# Altium PCB 1632440A+STM32F103RCT6核心板核心板.pcbdoc (part 1 of 2)
Units mil, origin at the board's own origin, x right, y up, seen from the top; angles counter-clockwise.
Board outline 4628.86 x 2908 mil, 2 copper layers (Top Layer, Bottom Layer); 59 components, 70 nets, 308 pads, 126 vias.
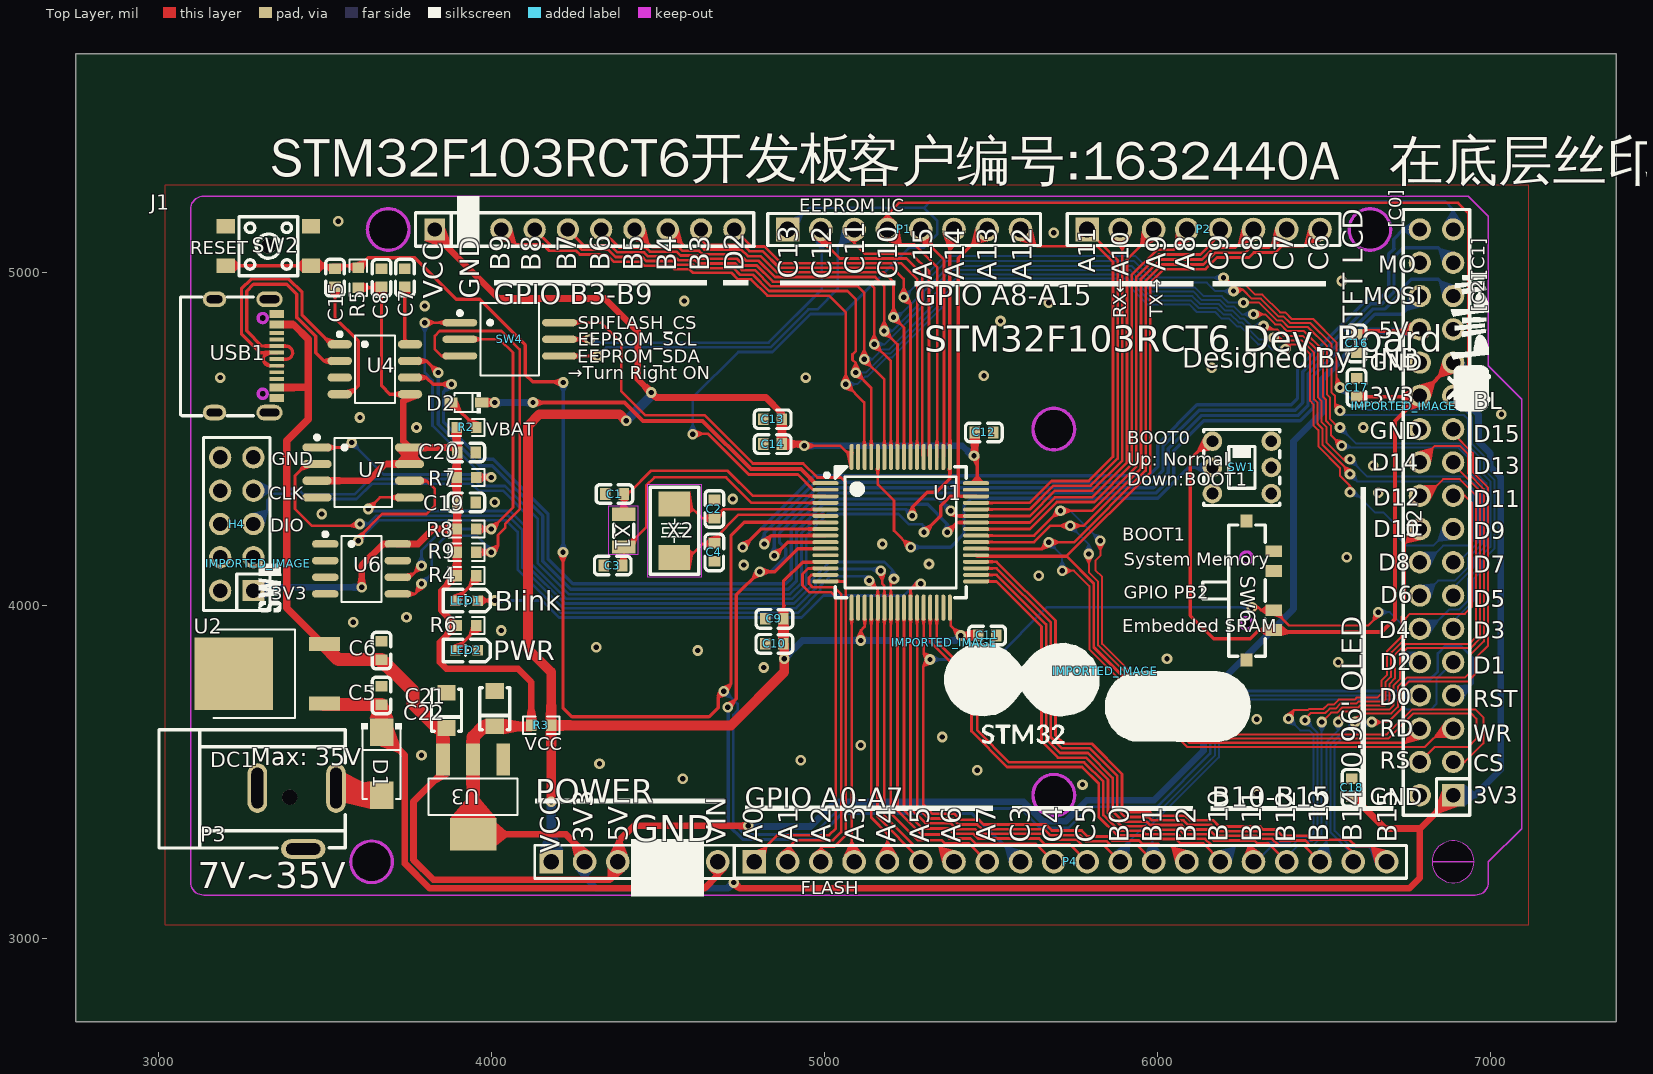
[diagram p0: Top Layer view]
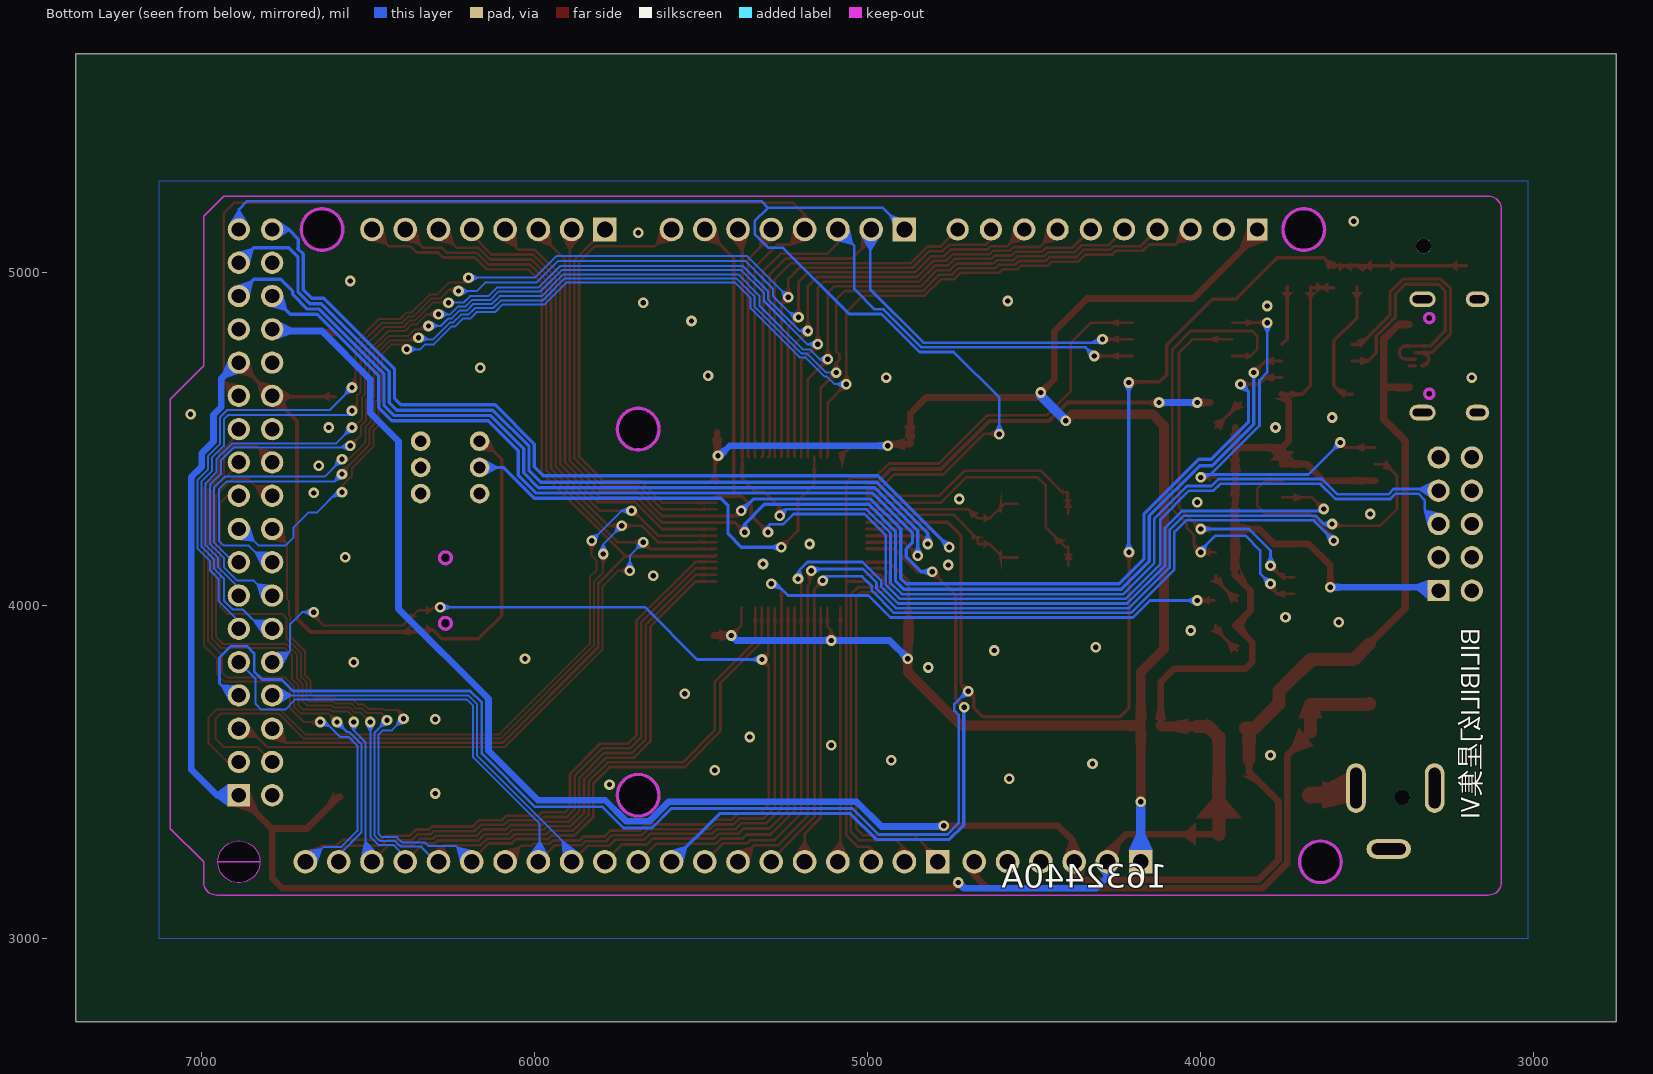
[diagram p1: Bottom Layer view, seen from below]

## Layer stack, top to bottom
Top Layer: signal copper (thickness not stored)
Dielectric: dielectric 12.6, FR-4, Dk 4.8
Bottom Layer: signal copper (thickness not stored)

## Board outline
7378.86,2750 2750,2750 2750,5658 7378.86,5658
cut-out: 6701.36,5130 ccw(c6638.86,5129.57) 6576.36,5130 ccw(c6638.86,5130.43)
cut-out: 5751.36,3430 ccw(c5688.86,3429.57) 5626.36,3430 ccw(c5688.86,3430.43)
cut-out: 5751.36,4530 ccw(c5688.86,4529.57) 5626.36,4530 ccw(c5688.86,4530.43)
cut-out: 3751.36,5130 ccw(c3688.86,5129.57) 3626.36,5130 ccw(c3688.86,5130.43)
cut-out: 3701.36,3230 ccw(c3638.86,3229.57) 3576.36,3230 ccw(c3638.86,3230.43)
cut-out: 6825.86,3230 ccw(c6888.85,3230) 6951.84,3230 ccw(c6888.85,3230)

## Design rules (kind name [scope] priority, off if disabled: settings)
BoardOutlineClearance Default [All] p0: genericclearance=10 ignorepadtopadclearanceinfootprint=FALSE except(0: Region-CutoutEdge Arc-SplitContinuation Track-SplitContinuation SMDPad-SplitContinuation THPad-SplitContinuation Via-SplitContinuation Fill-SplitContinuation Poly-SplitContinuation Region-SplitContinuation Text-SplitContinuation; 6: Track-OutlineEdge SMDPad-OutlineEdge THPad-OutlineEdge Via-OutlineEdge Fill-OutlineEdge Region-OutlineEdge Poly-OutlineEdge Text-OutlineEdge Track-CutoutEdge SMDPad-CutoutEdge THPad-CutoutEdge Via-CutoutEdge Fill-CutoutEdge)
Clearance Default [(InNet('GND') OR InNet('VCC') OR InNet('+5V') OR InNet('NRST') OR InNet('PC13') OR InNet('VIN') OR InNet('PA15') OR InNet('PA12') OR InNet('PA11') OR InNet('PA8') OR InNet('PC14') OR InNet('PC15') OR InNet('BOOT0') OR InNet('PD2') OR InNet('PA14') OR InNet('PA13') OR InNet('PA10') OR InNet('PA9') OR InNet('BOOT1') OR InNet('PC5') OR InNet('PC4') OR InNet('PA4') OR InNet('PA3') OR InNet('PA1') OR InNet('PA0') OR InNet('PC3') OR InNet('PC2') OR InNet('PC1') OR InNet('PC0') OR InNet('PD1') OR InNet('PD0') OR InNet('VBAT') OR InNet('D-') OR InNet('D+') OR InNet('3V3') OR InNet('$1N18623') OR InNet('RTS#') OR InNet('$1N19799') OR InNet('$1N22553') OR InNet('$1N23236') OR InNet('$1N24394') OR InNet('LCD_CS') OR InNet('LCD_RS') OR InNet('LCD_WR') OR InNet('LCD_RD') OR InNet('LCD_D0') OR InNet('LCD_D1') OR InNet('LCD_D3') OR InNet('LCD_D4') OR InNet('LCD_D5') OR InNet('LCD_D6') OR InNet('LCD_D7') OR InNet('LCD_D8') OR InNet('LCD_D9') OR InNet('LCD_D10') OR InNet('LCD_D11') OR InNet('LCD_D12') OR InNet('LCD_D13') OR InNet('LCD_D14') OR InNet('LCD_D15') OR InNet('LCD_BL') OR InNet('EEPROM_SCL') OR InNet('EEPROM_SDA') OR InNet('FLASH_MOSI') OR InNet('FLASH_MISO') OR InNet('FLASH_SCLK') OR InNet('FLASH_CS') OR InNet('JP_EEPROM_SCL') OR InNet('JP_EEPROM_SDA') OR InNet('JP_FLASH_CS'))] p1: gap=7 ignorepadtopadclearanceinfootprint=FALSE except(0: Region-Region Region-Text Text-Text; 6: Track-Track Track-SMDPad SMDPad-SMDPad Track-THPad SMDPad-THPad THPad-THPad Track-Via SMDPad-Via THPad-Via Via-Via Track-Fill SMDPad-Fill THPad-Fill Via-Fill Fill-Fill Track-Region SMDPad-Region THPad-Region Via-Region Fill-Region Track-Poly SMDPad-Poly THPad-Poly Via-Poly Fill-Poly Region-Poly Poly-Poly Track-Text SMDPad-Text THPad-Text Via-Text Fill-Text Poly-Text Track-Sheet SMDPad-Sheet THPad-Sheet Via-Sheet Fill-Sheet Region-Sheet Poly-Sheet Text-Sheet Track-Hole SMDPad-Hole THPad-Hole Via-Hole Fill-Hole Region-Hole Poly-Hole Text-Hole Sheet-Hole)
DiffPairsRouting differentialPair [All] p1: maxuncoupledlength=10 minlimit=6 maxlimit=6 mostfreqgap=6 toplayer_minwidth=5 toplayer_prefwidth=10 toplayer_maxwidth=100 bottomlayer_minwidth=5 bottomlayer_prefwidth=10 bottomlayer_maxwidth=100
PasteMaskExpansion pasteMaskExpansion [All] p1: expansion=0
PlaneConnect Default [All] p1: planeconnectstyle=Relief reliefexpansion=20 reliefentries=4 reliefconductorwidth=0 reliefairgap=10
PolygonConnect gge66728 [All] p1: connectstyle=Relief reliefentries=4 reliefconductorwidth=0 polygonreliefangle="90 Angle" airgapwidth=10
PolygonConnect gge66721 [All] p1: connectstyle=Relief reliefentries=4 reliefconductorwidth=0 polygonreliefangle="90 Angle" airgapwidth=10
RoutingVias Default [All] p1: viastyle="Through Hole" holewidth=16 minholewidth=16 maxholewidth=2362 width=32 minwidth=32 maxwidth=3938
SolderMaskExpansion solderMaskExpansion [All] p1: useseparateexpansions=TRUE expansion=4 expansionbottom=4
Width Default [All] p1: maxlimit=1000 minlimit=6 preferedwidth=10

## Components (designator, comment, footprint, x,y, rotation, side; value= is the part's Value field where it differs from the comment)
C1 "7pF" C0603 4368.86,4335 r0 top
C2 "20pF" C0603 4668.86,4290 r270 top
C3 "7pF" C0603 4363.86,4120 r0 top
C4 "20pF" C0603 4668.86,4160 r90 top
C5 "GRM188R6YA106MA73D" C0603 3668.86,3730 r90 top
C6 "GRM188R6YA106MA73D" C0603 3668.86,3865 r90 top
C7 "CL10B104KB8NNNC" C0603 3738.86,4985 r270 top
C8 "CL10B104KB8NNNC" C0603 3668.86,4985 r90 top
C9 "100nF" C0603 4848.86,3960 r180 top
C10 "100nF" C0603 4848.86,3885 r180 top
C11 "100nF" C0603 5488.86,3910 r0 top
C12 "100nF" C0603 5478.86,4520 r0 top
C13 "100nF" C0603 4843.86,4560 r180 top
C14 "100nF" C0603 4843.86,4485 r180 top
C15 "100nF" C0603 3528.86,4985 r270 top
C16 "100nF" C0603 6598.86,4787.56 r270 top
C17 "100nF" C0603 6598.86,4655 r90 top
C18 "100nF" C0603 6583.86,3452.56 r90 top
C19 "100nF" C0603 3923.86,4310 r0 top
C20 "100nF" C0603 3923.86,4460 r0 top
C21 "10uF" CAP-SMD_L3.2-W1.6 3863.86,3685 r90 top
C22 "10uF" CAP-SMD_L3.2-W1.6 4008.86,3690 r90 top
D1 "SS34" SMA_L4.3-W2.7-LS5.1-RD 3668.86,3525 r270 top
D2 "1N5819WS" SOD-323_L1.8-W1.3-LS2.5-RD 3923.86,4610 r180 top
DC1 "DC-005-20A" DC-IN-TH_DC-005-20A 3413.86,3360 r0 top
H2 "DS1023-2*18SF11" HDR-TH_36P-P2.54-V-F-R2-C18-S2.54-1 6838.86,4280 r90 top
H4 "DS1023-2*5SF11" HDR-TH_10P-P2.54-V-F-R2-C5-S2.54 3233.86,4245 r90 top
IMPORTED_IMAGE "IMPORTED_IMAGE" IMPORTED_IMAGE 3298.86,4125.81 r0 top
IMPORTED_IMAGE "IMPORTED_IMAGE" IMPORTED_IMAGE 6740.24,4598.57 r0 top
IMPORTED_IMAGE "IMPORTED_IMAGE" IMPORTED_IMAGE 5359.89,3887.72 r0 top
IMPORTED_IMAGE "IMPORTED_IMAGE" IMPORTED_IMAGE 5843.42,3802.46 r0 top
J1 "2.54-1*10P母" HDR-TH_10P-P2.54-V-F 4278.86,5130 r0 top
LED1 "19-217/GHC-YR1S2/3T" LED0603-R-RD 3923.86,4015 r180 top
LED2 "19-217/GHC-YR1S2/3T" LED0603-R-RD 3923.86,3865 r180 top
P1 "2.54-1*8P母环保" HDR-TH_8P-P2.54-V-F-1 5238.86,5130 r0 top
P2 "2.54-1*8P母环保" HDR-TH_8P-P2.54-V-F-1 6138.86,5130 r0 top
P3 "2.54-1*6P母" HDR-TH_6P-P2.54-V-F 4428.86,3230 r0 top
P4 "2.54-1*20P母" HDR-TH_20P-P2.54-V-F 5738.86,3230 r0 top
R2 "0Ω" R0603 3923.86,4535 r0 top
R3 "0Ω" R0603 4148.86,3640 r0 top
R4 "0603WAF1001T5E" R0603 3923.86,4090 r0 top
R5 "0603WAF1002T5E" R0603 3598.86,4985 r270 top
R6 "0603WAF1001T5E" R0603 3923.86,3940 r0 top
R7 "0603WAF1002T5E" R0603 3923.86,4385 r180 top
R8 "0603WAF1002T5E" R0603 3923.86,4230 r180 top
R9 "0603WAF1002T5E" R0603 3923.86,4160 r0 top
SW1 "XKB5858-Z-75" SW-TH_6P-L5.8-W5.8-P2.00-LS4.5-BL 6253.86,4415 r90 top
SW2 "4.5x4.5x3.8贴片" SW-SMD_4P-L4.5-W4.5-P3.00-LS6.8 3328.86,5080 r180 top
SW4 "DSHP03TS-S" SW-SMD_DSHP03TS-S 4053.86,4800 r270 top
SW6 "K3-1311S-F1" SW-SMD_K3-1311S-F1 6308.86,4045 r270 top
U1 "STM32F103RCT6" LQFP-64_L10.0-W10.0-P0.50-LS12.0-BL 5228.86,4220 r270 top
U2 "CJ7805 3%" TO-252-2_L6.6-W6.1-P4.58-LS10.1-BR-CW 3361.16,3795 r0 top
U3 "SK1117-3.3" SOT-223_L6.5-W3.5-P2.30-LS7.0-BR 3943.86,3425 r90 top
U4 "CH340N" SOP-8_L4.9-W3.9-P1.27-LS6.0-BL 3648.86,4710 r270 top
U6 "AT24C02" SOP-8_L5.0-W4.0-P1.27-LS6.0-BL 3608.86,4110 r270 top
U7 "BY25Q64ASSIG(T)" SOIC-8_L5.3-W5.3-P1.27-LS8.0-BL 3613.86,4400 r270 top
USB1 "TYPE-C 16PIN 2MD(073)" USB-C-SMD_TYPE-C-6PIN-2MD-073 3260.35,4750.15 r270 top
X1 "32.768kHz" FC-135R_L3.2-W1.5 4396.42,4225.21 r270 top
X2 "8MHz" CRYSTAL-SMD_L5.0-W3.2 4548.86,4225 r90 top

## Footprints (in the part's own frame and the unit in brackets; to place one, negate y for a bottom-side part, rotate by r counter-clockwise, add the part's x,y. Pads: shape width x height; smd on the part's side, far side on the other; paste and mask are expansions set on the pad)
C0603 [mm]
  rect 0.8x0.9 smd: 1(-0.7,0) 2(0.7,0)
  silkscreen extent -1.41,-0.71 1.39,0.72
CAP-SMD_L3.2-W1.6 [mil]
  rect 47.2x55.1 smd: 1(-53.1,0) 2(53.2,0)
  silkscreen extent -63,-45 63,45
CRYSTAL-SMD_L5.0-W3.2 [mil]
  rect 74.8x94.5 smd: 1(-80.7,0) 2(80.7,0)
  silkscreen extent -131,-73 131,73
DC-IN-TH_DC-005-20A [mm]
  oval 1.5x3.8 hole 0.9 slot 3.1 at 90 deg copper offset -0.001,0: 1(3.001,2.325)
  oval 1.5x3.8 hole 0.9 slot 3.1 at 90 deg copper offset 0,0: 2(-3.001,2.325)
  oval 3.4x1.5 hole 0.9 slot 2.6 at 0 deg copper offset -0.001,0: 3(0.501,-2.325)
  silkscreen extent -10.51,-2.24 3.71,6.78
FC-135R_L3.2-W1.5 [mil]
  rect 39.4x70.9 smd: 1(-49.2,0) 2(49.2,0)
  silkscreen extent -20,-30 20,30
HDR-TH_6P-P2.54-V-F [mm]
  rect 1.8x1.8 hole 1.2: 1(-6.35,0)
  round 1.8 hole 1.2: 2(-3.81,0) 3(-1.27,0) 4(1.27,0) 5(3.81,0) 6(6.35,0)
  silkscreen extent -7.62,-1.27 7.62,1.27
HDR-TH_8P-P2.54-V-F-1 [mil]
  rect 70.9x70.9 hole 47.2: 1(-350,0)
  round 70.9 hole 47.2: 2(-250,0) 3(-150,0) 4(-50,0) 5(50,0) 6(150,0) 7(250,0) 8(350,0)
  silkscreen extent -410,-48 410,48
HDR-TH_10P-P2.54-V-F [mil]
  rect 62x66.9 hole 43.3: 1(-450,0)
  round 66.9 hole 43.3: 2(-350,0) 3(-250,0) 4(-150,0) 5(-50,0) 6(50,0) 7(150,0) 8(250,0) 9(350,0) 10(450,0)
  silkscreen extent -508,-50 510,50
HDR-TH_10P-P2.54-V-F-R2-C5-S2.54 [mm]
  rect 1.575x1.7 hole 1.1: 1(-5.08,-1.27)
  round 1.7 hole 1.1: 2(-5.08,1.27) 3(-2.54,-1.27) 4(-2.54,1.27) 5(0,-1.27) 6(0,1.27) 7(2.54,-1.27) 8(2.54,1.27) 9(5.08,-1.27) 10(5.08,1.27)
  silkscreen extent -6.6,-2.54 6.6,2.54
HDR-TH_20P-P2.54-V-F [mm]
  rect 1.8x1.8 hole 1.2: 1(-24.13,0)
  round 1.8 hole 1.2: 2(-21.59,0) 3(-19.05,0) 4(-16.51,0) 5(-13.97,0) 6(-11.43,0) 7(-8.89,0) 8(-6.35,0) 9(-3.81,0) 10(-1.27,0) 11(1.27,0) 12(3.81,0) 13(6.35,0) 14(8.89,0) 15(11.43,0) 16(13.97,0) 17(16.51,0) 18(19.05,0) 19(21.59,0) 20(24.13,0)
  silkscreen extent -25.65,-1.25 25.65,1.25
HDR-TH_36P-P2.54-V-F-R2-C18-S2.54-1 [mm]
  rect 1.7x1.7 hole 1.1: 1(-21.59,-1.27)
  round 1.7 hole 1.1: 2(-21.59,1.27) 3(-19.05,-1.27) 4(-19.05,1.27) 5(-16.51,-1.27) 6(-16.51,1.27) 7(-13.97,-1.27) 8(-13.97,1.27) 9(-11.43,-1.27) 10(-11.43,1.27) 11(-8.89,-1.27) 12(-8.89,1.27) 13(-6.35,-1.27) 14(-6.35,1.27) 15(-3.81,-1.27) 16(-3.81,1.27) 17(-1.27,-1.27) 18(-1.27,1.27) 19(1.27,-1.27) 20(1.27,1.27) 21(3.81,-1.27) 22(3.81,1.27) 23(6.35,-1.27) 24(6.35,1.27) 25(8.89,-1.27) 26(8.89,1.27) 27(11.43,-1.27) 28(11.43,1.27) 29(13.97,-1.27) 30(13.97,1.27) 31(16.51,-1.27) 32(16.51,1.27) 33(19.05,-1.27) 34(19.05,1.27) 35(21.59,-1.27) 36(21.59,1.27)
  silkscreen extent -23.11,-2.54 23.11,2.54
IMPORTED_IMAGE [mil]
  silkscreen extent 0,-146 68,0
LED0603-R-RD [mm]
  rect 0.8x0.8 smd: 1(0.851,0) 2(-0.851,0)
  silkscreen extent -1.82,-0.86 1.77,0.86
LQFP-64_L10.0-W10.0-P0.50-LS12.0-BL [mm]
  oval 0.3x2 smd: 1(-3.75,-5.75) 2(-3.25,-5.75) 3(-2.75,-5.75) 4(-2.25,-5.75) 5(-1.75,-5.75) 6(-1.25,-5.75) 7(-0.75,-5.75) 8(-0.25,-5.75) 9(0.25,-5.75) 10(0.75,-5.75) 11(1.25,-5.75) 12(1.75,-5.75) 13(2.25,-5.75) 14(2.75,-5.75) 15(3.25,-5.75) 16(3.75,-5.75) 33(3.75,5.75) 34(3.25,5.75) 35(2.75,5.75) 36(2.25,5.75) 37(1.75,5.75) 38(1.25,5.75) 39(0.75,5.75) 40(0.25,5.75) 41(-0.25,5.75) 42(-0.75,5.75) 43(-1.25,5.75) 44(-1.75,5.75) 45(-2.25,5.75) 46(-2.75,5.75) 47(-3.25,5.75) 48(-3.75,5.75)
  oval 2x0.3 smd: 17(5.75,-3.75) 18(5.75,-3.25) 19(5.75,-2.75) 20(5.75,-2.25) 21(5.75,-1.75) 22(5.75,-1.25) 23(5.75,-0.75) 24(5.75,-0.25) 25(5.75,0.25) 26(5.75,0.75) 27(5.75,1.25) 28(5.75,1.75) 29(5.75,2.25) 30(5.75,2.75) 31(5.75,3.25) 32(5.75,3.75) 49(-5.75,3.75) 50(-5.75,3.25) 51(-5.75,2.75) 52(-5.75,2.25) 53(-5.75,1.75) 54(-5.75,1.25) 55(-5.75,0.75) 56(-5.75,0.25) 57(-5.75,-0.25) 58(-5.75,-0.75) 59(-5.75,-1.25) 60(-5.75,-1.75) 61(-5.75,-2.25) 62(-5.75,-2.75) 63(-5.75,-3.25) 64(-5.75,-3.75)
  silkscreen extent -5,-5.79 5,5
R0603 [mil]
  rect 31.75x34.02 smd: 1(-29.66,0) 2(29.66,0)
  silkscreen extent -55,-26 55,26
SMA_L4.3-W2.7-LS5.1-RD [mil]
  rect 82.7x70.9 smd: 1(-94.5,0) 2(94.5,0)
  silkscreen extent -121,-61 106,61
SOD-323_L1.8-W1.3-LS2.5-RD [mm]
  rect 1x0.75 smd: 1(-1.173,0) 2(1.173,0)
  silkscreen extent -1.08,-0.8 0.9,0.8
SOIC-8_L5.3-W5.3-P1.27-LS8.0-BL [mm]
  oval 0.63x2.25 smd: 1(-1.905,-3.53) 2(-0.635,-3.53) 3(0.635,-3.53) 4(1.905,-3.53) 5(1.905,3.53) 6(0.635,3.53) 7(-0.635,3.53) 8(-1.905,3.53)
  silkscreen extent -2.82,-3.68 2.64,2.18
SOP-8_L4.9-W3.9-P1.27-LS6.0-BL [mm]
  oval 0.63x1.865 smd: 1(-1.905,-2.682) 2(-0.635,-2.682) 3(0.635,-2.682) 4(1.905,-2.682) 5(1.905,2.682) 6(0.635,2.682) 7(-0.635,2.682) 8(-1.905,2.682)
  silkscreen extent -2.82,-2.83 2.58,1.52
SOP-8_L5.0-W4.0-P1.27-LS6.0-BL [mil]
  oval 22.6x80.14 smd: 1(-75,-108.97) 2(-25,-108.97) 3(25,-108.97) 4(75,-108.97) 5(75,108.97) 6(25,108.97) 7(-25,108.97) 8(-75,108.97)
  silkscreen extent -110,-115 99,60
SOT-223_L6.5-W3.5-P2.30-LS7.0-BR [mm]
  rect 2.465x1.05 smd: 1(2.857,-2.3) 2(2.857,0) 3(2.857,2.3)
  rect 2.465x3.54 smd: 4(-2.857,0)
  silkscreen extent -1.4,-3.4 1.4,3.4
SW-SMD_4P-L4.5-W4.5-P3.00-LS6.8 [mil]
  rect 55.1x43.3 smd: 1(-127.9,59.1) 2(128,59.1) 3(-127.9,-59.1) 4(128,-59.1)
  silkscreen extent -89,-89 89,89
SW-SMD_DSHP03TS-S [mil]
  oval 22x104.5 smd: 1(-50,-149.7) 2(0,-149.7) 3(50,-149.7) 4(50,149.7) 5(0,149.7) 6(-50,149.7)
  silkscreen extent -110,-156 110,88
SW-SMD_K3-1311S-F1 [mil]
  rect 35.4x49.2 smd: 1(-118.1,40.8) 2(-59.1,40.8) 3(59.1,40.8) 4(118.1,40.8)
  rect 39.4x35.4 smd: 5(-208.7,-40.8) 6(208.7,-40.8)
  Board Outline Layer circle w0.2: c-98.4,-40.8 r17.7
  Board Outline Layer circle w0.2: c98.4,-40.8 r17.7
  Board Outline Layer circle w10: c-98.4,-40.8 r17.7
  Board Outline Layer circle w10: c98.4,-40.8 r17.7
  Multi-Layer board cut-out: -98.4,-23.1 -107.15,-25.55 -113.54,-32.02 -115.87,-40.8 -113.54,-49.58 -107.15,-56.05 -98.4,-58.5 -98.4,-58.5 -89.65,-56.05 -83.26,-49.58 -80.93,-40.8 -83.26,-32.02 -89.65,-25.55 -98.4,-23.1
  Multi-Layer board cut-out: 98.4,-23.1 89.65,-25.55 83.26,-32.02 80.93,-40.8 83.26,-49.58 89.65,-56.05 98.4,-58.5 98.4,-58.5 107.15,-56.05 113.54,-49.58 115.87,-40.8 113.54,-32.02 107.15,-25.55 98.4,-23.1
  silkscreen extent -197,-173 197,15
SW-TH_6P-L5.8-W5.8-P2.00-LS4.5-BL [mm]
  round 1.5 hole 0.9: 1(-2,-2.25) 2(0,-2.25) 3(2,-2.25) 4(-2,2.25) 5(0,2.25) 6(2,2.25)
  silkscreen extent -2.9,-2.9 2.9,2.9
TO-252-2_L6.6-W6.1-P4.58-LS10.1-BR-CW [mil]
  rect 93.07x41.89 smd: 1(136.3,-90) 3(136.3,90)
  rect 236.37x217.01 smd: 2(-136.3,0)
  silkscreen extent -198,-133 48,133
USB-C-SMD_TYPE-C-6PIN-2MD-073 [mm]
  rect 0.6x1.1 smd: 1(-3.2,2.375) 2(-2.4,2.375) 11(2.4,2.375) 12(3.2,2.375)
  rect 0.3x1.1 smd: 3(-1.75,2.375) 4(-1.25,2.375) 5(-0.75,2.375) 6(-0.25,2.375) 7(0.25,2.375) 8(0.75,2.375) 9(1.25,2.375) 10(1.75,2.375)
  oval 1.2x2 hole 0.6 slot 1.5 at 90 deg: 13(-4.325,1.825) 14(4.325,1.825)
  oval 1.2x1.8 hole 0.6 slot 1.2 at 90 deg: 13(-4.325,-2.375) 14(4.325,-2.375)
  Board Outline Layer circle w0.005: c-2.89,1.305 r0.35
  Board Outline Layer circle w0.005: c2.89,1.305 r0.35
  Board Outline Layer circle w0.254: c-2.89,1.305 r0.35
  Board Outline Layer circle w0.254: c2.89,1.305 r0.35
  Multi-Layer board cut-out: -2.89,1.655 -3.063,1.606 -3.189,1.478 -3.235,1.305 -3.189,1.131 -3.063,1.004 -2.89,0.955 -2.89,0.955 -2.717,1.004 -2.591,1.131 -2.545,1.305 -2.591,1.478 -2.717,1.606 -2.89,1.655
  Multi-Layer board cut-out: 2.89,1.655 2.717,1.606 2.591,1.478 2.545,1.305 2.591,1.131 2.717,1.004 2.89,0.955 2.89,0.955 3.063,1.004 3.189,1.131 3.235,1.305 3.189,1.478 3.063,1.606 2.89,1.655
  silkscreen extent -4.5,-4.97 4.57,0.6

## Free pads (board coordinates)
  round 45.4 hole 45.4 unplated: ""(3328.86,5080) ""(3392.86,3424)

## Via types
v1: diameter 32, hole 16, Top Layer to Bottom Layer, 126 vias

## Nets (pads, with @x,y where several pads share a name; then routed paths per layer and width w, separated by ;. In a path a pad name is that pad's centre, name@x,y a point inside that pad or via, vN(x,y) a via of type N, cw(c..) or ccw(c..) an arc to the next point about the centre after c; other vN are vias at no path point)
3V3: C8.1 C17.1 C18.1 C19.1 C20.1 C22.1 H2.1 H2.26 H2.27 H4.1 P3.2 R2.1 R3.1 R4.1 R5.2 R6.1 R7.2 R8.2 R9.1 SW1.6 SW6.4 U3.2 U3.4 U4.5 U6.8 U7.3 U7.7 U7.8 | length 10782
  Top Layer w10: R5.2@3598.86,4955.34 3666.76,4955.34 C8.1@3668.86,4957.44 3668.86,4660 3693.86,4635 U4.5@3754.47,4635 ; SW1.6@6165.28,4493.74 6152.6,4493.74 6098.86,4440 6098.86,3970 6168.86,3900 6278.86,3900 6305.76,3926.9 SW6.4@6349.66,3926.9 ; C17.1@6598.86,4627.44 H2.26@6786.29,4627.44
  Top Layer w12: SW6.4@6349.66,3926.9 6356.56,3920 6673.86,3920 6713.86,3960 6713.86,4555.01 6786.29,4627.44 6788.85,4630 H2.27@6888.86,4730
  Top Layer w19.68: v1(3608.86,4055) 3608.86,4120 3673.86,4185 U6.8@3717.83,4185
  Top Layer w20: U7.3@3474.88,4375 3628.86,4375 3678.86,4425 U7.7@3752.84,4425 U7.8@3752.84,4475 ; U6.8@3717.83,4185 3778.86,4185 3823.86,4230 R8.2@3894.2,4230 ; U4.5@3754.47,4635 3734.47,4615 3733.86,4615 3733.86,4493.98 U7.8@3752.84,4475 ; R2.1@3894.2,4535 C20.1@3894.2,4462.1 ; C20.1@3896.3,4460 C20.1@3894.2,4462.1 ; U3.4@3943.86,3312.5 4223.08,3312.5 4278.86,3256.72 P3.2@4278.86,3230 ; R3.1@4119.2,3640 4118.86,3640.34 4118.86,3770 4078.86,3810 3863.86,3810 3843.86,3830 3843.86,3889.66 R6.1@3894.2,3940 3848.86,3985.34 3848.86,4044.66 R4.1@3894.2,4090 3896.3,4092.1 C19.1@3896.3,4310 3894.2,4312.1 R7.2@3894.2,4385 C20.1@3894.2,4462.1 ; v1(4726.86,3168) 4744.86,3150 6756.86,3150 6788.85,3181.99 6788.85,3329.46 ; C18.1@6583.86,3425 6588.86,3425 6683.86,3330 6788.3,3330 6788.85,3329.46 ; H2.1@6888.87,3430.01 6888.87,3429.48 6788.85,3329.46 ; U7.8@3752.84,4475 3881.3,4475 C20.1@3894.2,4462.1
  Top Layer w29.53: C22.1@4008.86,3636.9 4116.1,3636.9 R3.1@4119.2,3640
  Top Layer w39.37: U3.4@3943.86,3312.5 U3.2@3943.86,3537.5 3943.86,3605 3975.76,3636.9 C22.1@4008.86,3636.9
  Bottom Layer w19.68: H4.1@3283.86,4045 3293.86,4055 v1(3608.86,4055)
  Bottom Layer w20: P3.2@4278.86,3230 4278.86,3185 4313.86,3150 4708.86,3150 v1(4726.86,3168) ; H2.27@6888.85,4730 6893.86,4730 6941.29,4682.56 6941.29,4597.44 6962.86,4575.87 6962.86,4575.29 6964.86,4573.62 6964.86,4492.84 6999.86,4457.84 6999.86,4417.85 7031.86,4385.85 7031.03,4383.51 7031.86,4382.68 7031.86,3507.39 6954.47,3430 H2.1@6888.87,3430.01
$1N18623: D1.2 DC1.1 | length 145.6
  Top Layer w50: DC1.1@3532.01,3451.54 3551.51,3432 3667.36,3432 D1.2@3668.86,3430.5
$1N19799: C7.2 U4.8 | length 178.9
  Top Layer w10: C7.2@3738.86,4957.44 3738.86,4800.61 U4.8@3754.47,4785
$1N22553: D2.2 R2.2 | length 106.9
  Top Layer w10: D2.2@3877.69,4610 3952.69,4535 R2.2@3953.52,4535
$1N23236: LED1.1 R4.2 | length 101.2
  Top Layer w10: LED1.1@3890.36,4015 3953.52,4078.16 R4.2@3953.52,4090
$1N24394: LED2.1 R6.2 | length 101.2
  Top Layer w10: LED2.1@3890.36,3865 3953.52,3928.16 R6.2@3953.52,3940
+5V: C6.1 C16.1 C21.1 H2.30 P3.3 U2.3 U3.3 USB1.2 USB1.11 | length 6582.9
  Top Layer w12: C16.1@6597.46,4818.84 C16.1@6608.86,4815.12 ; C16.1@6601.18,4815.12 C16.1@6608.86,4815.12 ; H2.30@6788.85,4830 6783.85,4825 6618.74,4825 C16.1@6608.86,4815.12
  Top Layer w20: U3.3@3853.31,3537.5 3853.31,3499.45 3764.86,3411 3764.86,3235.77 3824.63,3176 4354.86,3176 4378.86,3200 P3.3@4378.86,3230 4383.86,3235 4383.86,3295 4426.86,3338 v1(4770.86,3338)
  Top Layer w22: USB1.11@3372.36,4655.51 3447.67,4655.51 3448.86,4656.69 ; USB1.2@3372.36,4844.48 3404.37,4844.48 3448.86,4800 3448.86,4656.69 ; U2.3@3491.46,3885 3383.86,3992.6 3383.86,4495 3448.86,4560 3448.86,4656.69
  Top Layer w39.37: U2.3@3491.46,3885 3539.02,3837.44 C6.1@3668.86,3837.44 3763.86,3742.44 3763.86,3705 3836.96,3631.9 C21.1@3863.86,3631.9 3853.31,3621.35 U3.3@3853.31,3537.5
  Bottom Layer w20: v1(4770.86,3338) 4772.86,3336 4958.13,3336 5032.13,3410 5597.84,3410 5656.34,3351.5 5724.36,3351.5 5787.86,3415 5990.09,3415 6138.86,3563.77 6138.86,3720 6408.86,3990 6408.86,4493.67 6493.86,4578.67 6493.86,4679.61 6639.24,4825 6783.85,4825 H2.30@6788.85,4830
BOOT0: SW1.5 U1.60 | length 1368
  Top Layer w8: U1.60@5159.96,4446.37 5159.96,4363.9 5208.86,4315 5208.86,4225 v1(5258.86,4175)
  Bottom Layer w10: v1(5258.86,4175) 5378.86,4175 5418.86,4215 5418.86,4300 5440.86,4322 6001.74,4322 6094.74,4415 SW1.5@6165.28,4415
BOOT1: H2.10 P4.14 SW6.3 U1.28 | length 3162.3
  Top Layer w6: SW6.3@6349.66,3985.9 6395.56,3940 6633.86,3940 6663.86,3970 v1(6663.86,3980)
  Top Layer w8: U1.28@5297.76,3993.63 5297.76,3857.1 v1(5316.86,3838) 5296.86,3818 5296.86,3402 5324.86,3374 5390.86,3374 5408.86,3356 5464.25,3356 5478.25,3342 5664.86,3342 5682.86,3324 5772.66,3324 5790.66,3306 5852.45,3306 5864.45,3294 5944.66,3294 5954.31,3284.35 6002.51,3284.35 6008.86,3278 6040.86,3278 P4.14@6088.86,3230 ; v1(6283.86,3995) 6301.99,3995 6311.09,3985.9 SW6.3@6349.66,3985.9
  Bottom Layer w6: v1(6663.86,3980) 6698.86,3980 6734.54,3944.32 6734.54,3864.32 6768.86,3830 H2.10@6788.86,3830
  Bottom Layer w8: v1(5316.86,3838) 5511.86,3838 5668.86,3995 v1(6283.86,3995)
D+: U4.1 USB1.6 USB1.8 | length 775.7
  Top Layer w10: USB1.8@3334.22,4720.34 cw(c3333.56,4740.16) USB1.6@3333.86,4760 ; USB1.8@3353.86,4720 ccw(c3348.86,5275.5) USB1.8@3372.36,4720.47 ; USB1.6@3353.86,4760 USB1.6@3333.86,4760 ; U4.1@3543.25,4785 3517.6,4785 3429.86,4872.74 3429.86,4941.63 3390.48,4981 3277.23,4981 3247.86,4951.63 3247.86,4816 3303.86,4760 USB1.6@3333.86,4760
D-: U4.2 USB1.5 USB1.7 | length 803.6
  Top Layer w10: USB1.7@3353.86,4740.31 3381.25,4740.31 3381.47,4740.1 ccw(c3381.76,4759.93) 3381.1,4779.76 3381.02,4779.68 USB1.5@3353.86,4779.68 3309.18,4779.68 3263.86,4825 3263.86,4945 3283.86,4965 3383.86,4965 3413.86,4935 3413.86,4866.11 ; U4.2@3543.25,4735 3495.86,4735 3470.86,4760 3470.86,4809.11 3413.86,4866.11 ; 3413.86,4866.11 3413.86,4864.34 3413.48,4866.48 3413.86,4866.11
EEPROM_SCL: P1.2 SW4.5 U1.53 | length 1968.5
  Top Layer w8: SW4.5@4203.56,4800 v1(4293.86,4800) ; P1.2@4988.86,5130 4988.86,5100 5045.86,5043 5245.86,5043 5293.97,4994.88 5293.97,4450.15 U1.53@5297.76,4446.37
  Bottom Layer w8: v1(4293.86,4800) 4303.86,4790 4832.06,4790 4991.52,4949.46 4991.52,5127.34 P1.2@4988.86,5130
EEPROM_SDA: P1.3 SW4.4 U1.52 | length 1979.1
  Top Layer w8: SW4.4@4203.56,4750 v1(4318.86,4750) ; P1.3@5088.86,5130 5088.86,5090 5121.86,5057 5261.66,5057 5313.86,5004.8 5313.86,4449.95 U1.52@5317.44,4446.37
  Bottom Layer w8: v1(4318.86,4750) 4344.86,4776 4837.86,4776 4951.86,4890 4978.86,4890 5039.43,4950.57 5039.43,5080.57 P1.3@5088.86,5130
FLASH_CS: P4.3 SW4.6 U1.16 | length 2395.2
  Top Layer w8: SW4.6@4203.56,4850 4328.86,4850 4388.86,4790 4388.86,4644.04 4460.9,4572 4639.48,4572 4784.48,4427 4935.9,4427 4978.26,4384.64 5049.22,4384.64 5063.86,4370 5063.86,4072.36 U1.16@5002.49,4072.36 ; P4.3@4988.86,3230 4988.86,3270 4993.86,3275 5028.86,3275 5063.86,3310 5063.86,4070
FLASH_MISO: P4.7 U1.22 U7.2 | length 3225.2
  Top Layer w8: U7.2@3474.88,4425 3443.86,4425 3408.86,4390 3408.86,4290 3458.86,4240 3598.86,4240 v1(3603.86,4245) ; v1(5168.86,4105) 5173.86,4100 5173.86,4065 5179.65,4059.21 U1.22@5179.65,3993.63 5179.65,3367.21 5266.86,3280 5338.86,3280 P4.7@5388.86,3230
  Bottom Layer w8: v1(3603.86,4245) 3628.86,4245 3653.86,4270 4049.06,4270 4091.86,4227.2 4091.86,4113.76 4213.62,3992 4914.09,3992 4972.86,4050.76 4972.86,4069 5013.86,4110 5163.86,4110 v1(5168.86,4105)
FLASH_MOSI: P4.8 U1.23 U7.5 | length 3057.8
  Top Layer w8: v1(3628.86,4290) 3663.86,4325 U7.5@3752.84,4325 ; 5198.86,4065 5199.33,4064.53 ; v1(5208.86,4080) 5199.33,4070.47 5199.33,4064.53 ; P4.8@5488.86,3230 5432.86,3286 5360.86,3286 5351.96,3294.9 5279.96,3294.9 5199.33,3375.53 U1.23@5199.33,3993.63 5199.33,4064.53
  Bottom Layer w8: v1(3628.86,4290) 3634.86,4284 4054.86,4284 4105.86,4233 4105.86,4119.56 4219.42,4006 4908.3,4006 4958.86,4056.56 4958.86,4074.8 5015.06,4131 5179.63,4131 5203.86,4106.77 5203.86,4085 v1(5208.86,4080)
FLASH_SCLK: P4.6 U1.21 U7.6 | length 3124.9
  Top Layer w8: v1(3598.86,4195) 3598.86,4203.23 3670.63,4275 3803.86,4275 3828.86,4300 3828.86,4350 3803.86,4375 U7.6@3752.84,4375 ; v1(5133.86,4075) 5159.96,4048.9 U1.21@5159.96,3993.63 5158.86,3992.53 5158.86,3366 5288.86,3236 P4.6@5288.86,3230
  Bottom Layer w8: v1(3598.86,4195) 3659.86,4256 4043.26,4256 4077.86,4221.4 4077.86,4107.96 4207.82,3978 4919.89,3978 4986.86,4044.96 4986.86,4058 5016.46,4087.6 5121.26,4087.6 v1(5133.86,4075)
GND: C1.1 C2.1 C3.1 C4.1 C5.2 C6.2 C7.1 C8.2 C9.2 C10.2 C11.2 C12.2 C13.2 C14.2 C16.2 C17.2 C18.2 C19.2 C20.2 C21.2 C22.2 DC1.2 DC1.3 H2.2 H2.24 H2.28 H2.29 H4.9 J1.2 LED2.2 P3.4 P3.5 SW1.4 SW2.3 SW2.4 SW6.1 U1.12 U1.18 U1.31 U1.47 U1.63 U2.2 U3.1 U4.3 U6.1 U6.2 U6.3 U6.4 U6.7 U7.4 USB1.1 USB1.12 USB1.13 USB1.14
  other v1: 6298.86,3435 5774.86,3462 4573.86,3480 5458.86,3505 4323.86,3525 4928.86,3535 3788.86,3550 5108.86,3580 5353.86,3605 6298.86,3658.28 5548.86,3735 4816.86,3814 6543.86,3830 6028.86,3840 4618.86,3865 4313.86,3875 4028.86,3925 3583.86,3950 3743.86,3965 5643.86,4090 4756.86,4122 5313.86,4125 6568.86,4145 5173.86,4185 3488.86,4275 4008.86,4310 4723.86,4320 6663.86,4338.4 6648.86,4420 3773.86,4535 6618.86,4535 3603.86,4565 7033.86,4575 3183.86,4685 4943.86,4685 5478.86,4690 6163.86,4715 5528.86,4855 3798.86,4900 5673.86,4910 4578.86,4915 6553.86,4975 5688.86,5120 3538.86,5155
JP_EEPROM_SCL: R8.1 SW4.2 U6.6 | length 1146
  Top Layer w8: U6.6@3717.83,4085 3753.86,4085 v1(3788.86,4120) ; SW4.2@3904.16,4800 4023.86,4800 4063.86,4760 4063.86,4295 v1(3998.86,4230) R8.1@3953.52,4230
  Bottom Layer w8: v1(3788.86,4120) 3788.86,4165 3853.86,4230 v1(3998.86,4230)
JP_EEPROM_SDA: R9.2 SW4.3 U6.5 | length 1522.4
  Top Layer w8: U6.5@3717.83,4035 3768.86,4035 3788.86,4055 v1(3788.86,4065) ; SW4.3@3904.16,4750 3848.86,4750 3828.86,4770 3828.86,4810.4 3843.46,4825 4028.86,4825 4083.86,4770 4083.86,4289 4040.86,4246 4040.86,4234 4018.86,4212 4018.86,4180 v1(3998.86,4160) R9.2@3953.52,4160
  Bottom Layer w8: v1(3788.86,4065) 3819.88,4096.03 3819.88,4166.03 3863.86,4210 3953.86,4210 3998.86,4165 v1(3998.86,4160)
JP_FLASH_CS: R7.1 SW4.1 U7.1 | length 1250.7
  Top Layer w8: U7.1@3474.88,4475 3563.86,4475 v1(3578.86,4490) ; v1(3798.86,4850) SW4.1@3904.16,4850 ; R7.1@3953.52,4385 v1(3998.86,4385)
  Bottom Layer w8: v1(3578.86,4490) 3674.86,4394 3968.64,4394 ; v1(3798.86,4850) 3798.86,4700 3821.97,4676.89 3821.97,4540.68 3968.64,4394 ; v1(3998.86,4385) 3989.86,4394 3968.64,4394
LCD_BL: H2.25 P1.4 U1.51 | length 3155.9
  Top Layer w8: U1.51@5337.13,4446.37 5338.86,4448.1 5338.86,5015.72 5269.58,5085 5228.86,5085 5188.86,5125 P1.4@5188.86,5130 5188.86,5175 5223.86,5210 6903.86,5210 6933.86,5180 6933.86,4675 H2.25@6888.86,4630
LCD_CS: H2.3 P2.5 U1.40 | length 3430.6
  Top Layer w6: v1(5828.86,4195) 5828.86,4150 5813.86,4135 5813.86,4106.58 5833.86,4086.58 5833.86,3885 6105.86,3613 6689.89,3613 6764.42,3687.54 6956.32,3687.54 6979.74,3664.12 6979.74,3585.88 6923.86,3530 H2.3@6888.85,3530
  Top Layer w8: U1.40@5455.23,4210.16 5629.22,4210.16 5704.06,4285 v1(5708.86,4285) 5804.46,4285 5936.86,4417.4 5936.86,4987.4 6004.46,5055 6129.06,5055 6188.86,5114.8 P2.5@6188.86,5130
  Bottom Layer w6: v1(5708.86,4285) 5738.86,4285 v1(5828.86,4195)
LCD_D0: H2.8 LED1.2 P4.12 U1.26 | length 4004
  Top Layer w8: LED1.2@3957.36,4015 v1(4008.86,4015) ; v1(5288.86,4065) 5276.39,4065 5258.39,4047 U1.26@5258.39,3993.63 5258.39,3390.47 5302.86,3346 5378.43,3346 5396.43,3328 5452.66,3328 5466.66,3314 5652.86,3314 5670.86,3296 5758.86,3296 5776.86,3278 5840.86,3278 P4.12@5888.86,3230
  Bottom Layer w6: P4.12@5888.86,3230 5888.86,3264.97 6172.86,3548.97 6172.86,3703.62 6199.24,3730 H2.8@6788.86,3730
  Bottom Layer w8: v1(4008.86,4015) 4151.02,4015 4202.02,3964 4930.6,3964 4996.6,4030 5238.86,4030 5273.86,4065 v1(5288.86,4065)
LCD_D1: H2.9 P4.13 U1.27 | length 2758.6
  Top Layer w8: U1.27@5278.07,3993.63 5278.07,3394.79 5312.86,3360 5384.86,3360 5402.86,3342 5458.45,3342 5472.45,3328 5658.86,3328 5676.86,3310 5766.86,3310 5784.86,3292 5846.66,3292 5858.66,3280 5938.86,3280 P4.13@5988.86,3230
  Bottom Layer w6: P4.13@5988.86,3230 5984.86,3234 5984.86,3344 6184.86,3544 6184.86,3698.64 6204.21,3718 6718.86,3718 6749.32,3687.54 6821.39,3687.54 6838.86,3705 6838.86,3780 H2.9@6888.86,3830
LCD_D3: H2.11 J1.9 U1.55 | length 3979.7
  Top Layer w6: v1(6198.86,4985) 6213.86,4970 6257.86,4970 6293.86,4934 6315.77,4934 6368.77,4881 6383.77,4881 6403.77,4861 6467.86,4861 6538.86,4790 6538.86,4665 v1(6548.86,4655)
  Top Layer w8: J1.9@4628.86,5130 4628.86,5100 4644.86,5084 4755.06,5084 4774.06,5065 4813.86,5065 4863.86,5015 5203.86,5015 5237.82,4981.04 v1(5237.82,4926.04) 5258.39,4905.47 U1.55@5258.39,4446.37
  Bottom Layer w6: v1(5237.82,4926.04) 5361.78,5050 5934.44,5050 5999.44,4985 v1(6198.86,4985) ; v1(6548.86,4655) 6616.32,4587.54 6924.33,4587.54 6943.86,4568 6943.86,4566.37 6945.86,4564.71 6945.86,4485 ; H2.11@6888.86,3930 6888.86,3952.98 6950.37,4014.48 6950.37,4080.54 6975.04,4105.22 6975.04,4133.3 7012.86,4171.12 7012.86,4377.98 6980.86,4409.98 6980.86,4449.97 6945.86,4484.97
LCD_D4: H2.12 J1.8 U1.56 | length 4176.4
  Top Layer w6: v1(6228.86,4945) 6233.86,4950 6255.86,4950 6283.86,4922 6310.8,4922 6363.8,4869 6378.8,4869 6398.8,4849 ; 6398.86,4849 6459.86,4849 6523.86,4785 6523.86,4640 6533.86,4630 6533.86,4605 6548.86,4590 v1(6548.86,4585)
  Top Layer w8: J1.8@4528.86,5130 4578.86,5080 4628.86,5080 4638.86,5070 4749.26,5070 4769.26,5050 4807.85,5050 4856.85,5001 5177.86,5001 5207.32,4971.53 v1(5207.32,4866.53) 5238.7,4835.16 U1.56@5238.7,4446.37
  Bottom Layer w6: v1(5207.32,4866.53) 5220.39,4866.53 5283.86,4930 5283.86,4952.28 5367.58,5036 5928.64,5036 5994.64,4970 6148.86,4970 6173.86,4945 v1(6228.86,4945) ; v1(6548.86,4585) 6561.39,4572.46 6921.13,4572.46 6933.86,4559.74 6933.86,4480 6968.86,4445 6968.86,4405 7000.86,4373 7000.86,4176.09 6963.04,4138.27 6963.04,4110.19 6934.08,4081.23 6934.08,4015.17 6906.45,3987.54 6876.39,3987.54 6818.86,3930 H2.12@6788.86,3930
LCD_D5: H2.13 J1.7 U1.57 | length 4051.5
  Top Layer w6: v1(6258.86,4910) 6305.83,4910 6358.83,4857 6373.83,4857 6393.83,4837 6451.86,4837 6509.86,4779 6509.86,4634 6518.86,4625 6518.86,4560 6543.86,4535 v1(6548.86,4535)
  Top Layer w8: J1.7@4428.86,5130 4481.36,5077.5 4561.36,5077.5 4572.86,5066 4622.86,5066 4632.86,5056 4743.46,5056 4763.46,5036 4802.05,5036 4851.05,4987 5151.86,4987 5178.86,4960 v1(5178.86,4825) 5219.02,4784.84 U1.57@5219.02,4446.37
  Bottom Layer w6: v1(5178.86,4825) 5203.86,4825 5298.86,4920 5298.86,4945 5373.86,5020 5923.86,5020 5988.86,4955 6113.86,4955 6138.86,4930 6193.86,4930 6213.86,4910 v1(6258.86,4910) ; v1(6548.86,4535) 6596.32,4487.54 6908.35,4487.54 6956.28,4439.6 6956.28,4400.61 6988.86,4368.03 6988.86,4181.06 6951.04,4143.24 6951.04,4115.16 6888.86,4052.98 H2.13@6888.86,4030
LCD_D6: H2.14 J1.6 U1.58 | length 4230.7
  Top Layer w6: v1(6288.86,4875) 6323.86,4875 6353.86,4845 6368.86,4845 6388.86,4825 6439.77,4825 6497.86,4766.91 6497.86,4626.69 6506.86,4617.69 6506.86,4555.03 6507.33,4556.67 6507.33,4554.56 6521.41,4540.47 6521.41,4512.44 v1(6553.86,4480)
  Top Layer w8: J1.6@4328.86,5130 4383.76,5075.1 4463.96,5075.1 4475.56,5063.5 4555.56,5063.5 4567.06,5052 4617.06,5052 4627.06,5042 4737.66,5042 4757.66,5022 4796.25,5022 4845.25,4973 5130.86,4973 5148.86,4955 v1(5148.86,4785) 5199.33,4734.53 U1.58@5199.33,4446.37
  Bottom Layer w6: v1(5148.86,4785) 5180.83,4785 5310.86,4915.03 5310.86,4940.03 5378.83,5008 5918.89,5008 5983.89,4943 6108.89,4943 6133.89,4918 6188.89,4918 6208.89,4898 6230.86,4898 6253.86,4875 v1(6288.86,4875) ; v1(6553.86,4480) 6558.32,4475.54 6903.38,4475.54 6943.08,4435.83 6943.08,4395.78 6975.86,4363 6975.86,4185.03 6933.86,4143.03 6933.86,4114.95 6893.91,4075 6843.86,4075 6798.86,4030 H2.14@6788.86,4030
LCD_D7: H2.15 J1.5 U1.59 | length 4131.7
  Top Layer w6: v1(6318.86,4840) 6328.86,4830 6359.94,4830 6379.37,4810.57 6437.23,4810.57 6482.86,4764.94 6482.86,4624.72 6493.86,4613.72 6493.86,4551.06 6508.86,4536.06 6508.86,4489.64 6558.5,4440 v1(6578.86,4440)
  Top Layer w8: J1.5@4228.86,5130 4276.26,5082.6 4356.46,5082.6 4377.96,5061.1 4458.16,5061.1 4469.76,5049.5 4549.76,5049.5 4561.26,5038 4611.26,5038 4621.26,5028 4731.86,5028 4751.86,5008 4790.45,5008 4839.45,4959 5099.86,4959 5118.86,4940 v1(5118.86,4740) 5179.65,4679.21 U1.59@5179.65,4446.37
  Bottom Layer w6: v1(5118.86,4740) 5143.86,4740 5173.86,4770 5193.86,4770 5323.86,4900 5323.86,4930 5388.86,4995 5913.86,4995 5978.86,4930 6104.92,4930 6128.92,4906 6183.86,4906 6203.92,4886 6225.89,4886 6248.89,4863 6258.86,4863 6281.86,4840 v1(6318.86,4840) ; v1(6578.86,4440) 6631.32,4387.54 6931.32,4387.54 6963.86,4355 6963.86,4190 6903.86,4130 H2.15@6888.86,4130
LCD_D8: H2.16 J1.4 U1.61 | length 4302.7
  Top Layer w6: v1(6348.86,4805) 6356.86,4797 6433.83,4797 6470.86,4759.97 6470.86,4619.75 6481.86,4608.75 6481.86,4546.09 6482.76,4546.5 6482.76,4545.19 6496.17,4531.78 6496.17,4482.69 6578.86,4400 v1(6578.86,4395)
  Top Layer w8: J1.4@4128.86,5130 4178.76,5080.1 4258.96,5080.1 4270.46,5068.6 4350.66,5068.6 4372.16,5047.1 4452.36,5047.1 4463.96,5035.5 4543.96,5035.5 4555.46,5024 4605.06,5024 4615.06,5014 4726.06,5014 4746.06,4994 4784.66,4994 4833.66,4945 5068.86,4945 5093.86,4920 5093.86,4765 5083.86,4755 5083.86,4738.23 5093.86,4728.23 v1(5093.86,4700) 5140.28,4653.58 U1.61@5140.28,4446.37
  Bottom Layer w6: v1(5093.86,4700) 5123.86,4700 5181.86,4758 5198.83,4758 5338.86,4898.03 5338.86,4928.03 5393.83,4983 5908.89,4983 5974.89,4917 6100.95,4917 6123.95,4894 6178.9,4894 6198.96,4874 6220.92,4874 6243.92,4851 6253.89,4851 6304.89,4800 6343.86,4800 v1(6348.86,4805) ; v1(6578.86,4395) 6601.39,4372.46 6926.39,4372.46 6948.86,4350 6948.86,4195 6933.86,4180 6858.86,4180 6808.86,4130 H2.16@6788.86,4130
LCD_D9: H2.17 J1.3 U1.62 | length 4116.1
  Top Layer w6: v1(6383.86,4770) 6398.86,4785 6428.86,4785 6458.86,4755 6458.86,4614.78 6468.86,4604.78 6468.86,4542.12 6483.86,4527.12 6483.86,4478.03 6548.86,4413.03 6548.86,4389.64 6578.86,4359.64 v1(6578.86,4340)
  Top Layer w8: J1.3@4028.86,5130 4073.86,5085 4153.86,5085 4172.76,5066.1 4253.16,5066.1 4264.66,5054.6 4344.86,5054.6 4366.36,5033.1 4446.56,5033.1 4458.16,5021.5 4538.16,5021.5 4549.66,5010 4594.06,5010 4604.06,5000 4720.26,5000 4740.26,4980 4778.86,4980 4827.86,4931 5012.86,4931 5063.86,4880 v1(5063.86,4665) 5118.86,4610 5118.86,4448.1 U1.62@5120.59,4446.37
  Bottom Layer w6: v1(5063.86,4665) 5098.86,4665 5121.86,4688 5128.83,4688 5186.83,4746 5203.8,4746 5350.86,4893.06 5350.86,4923.06 5398.8,4971 ; 5398.86,4971 5903.92,4971 5969.92,4905 6095.97,4905 6118.97,4882 6173.94,4882 6194,4862 6215.95,4862 6238.95,4839 6248.92,4839 6302.92,4785 6328.86,4785 6343.86,4770 v1(6383.86,4770) ; v1(6578.86,4340) 6593.86,4340 6653.86,4280 6678.86,4280 6723.86,4235 6723.86,4205 6748.86,4180 6828.86,4180 6878.86,4230 H2.17@6888.86,4230